# Altium PCB NRF24_PCB.PcbDoc
Units mm, origin at the board's own origin, x right, y up, seen from the top; angles counter-clockwise.
Board outline 30.29 x 14.5 mm, 2 copper layers (Top Layer, Bottom Layer); 2 components, 24 nets, 26 pads, 0 vias.
Unrouted connection lines stored in the file: 10.
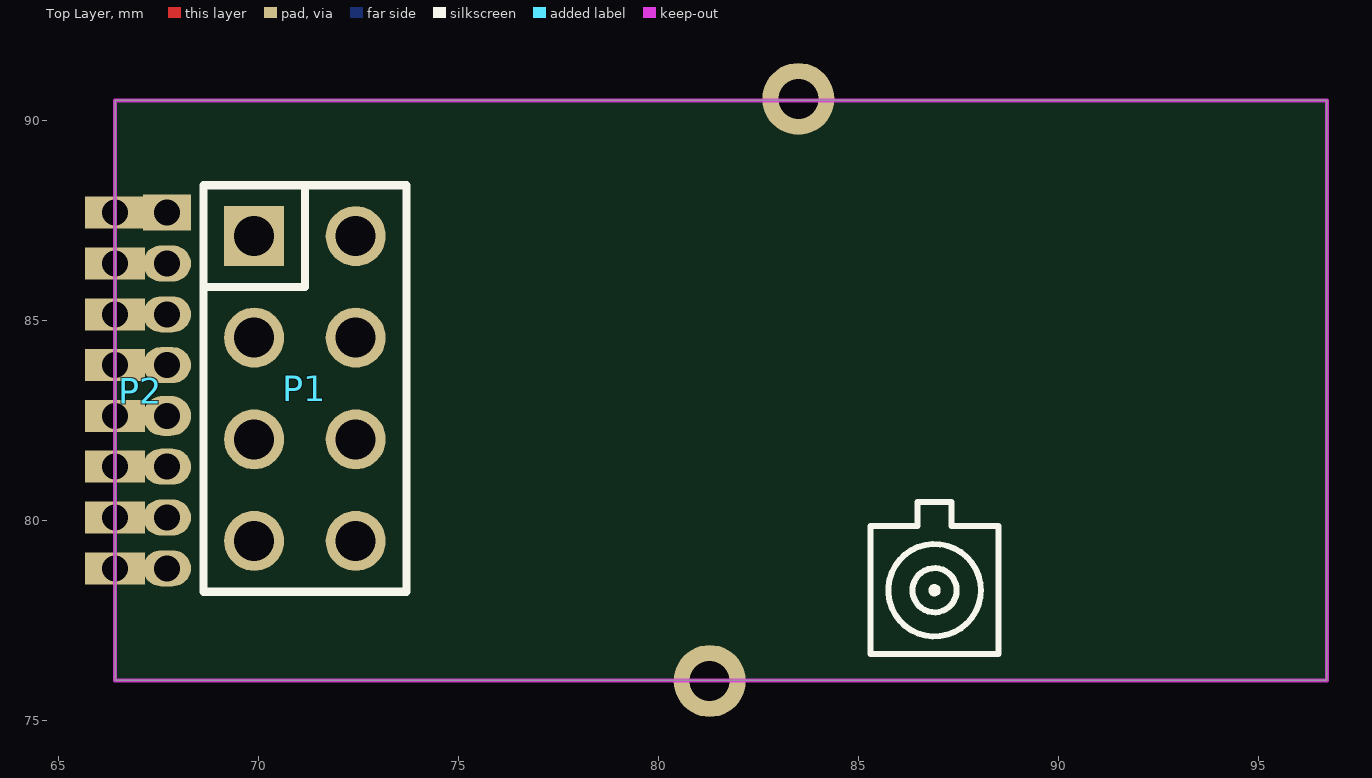
[diagram p0: Top Layer view]
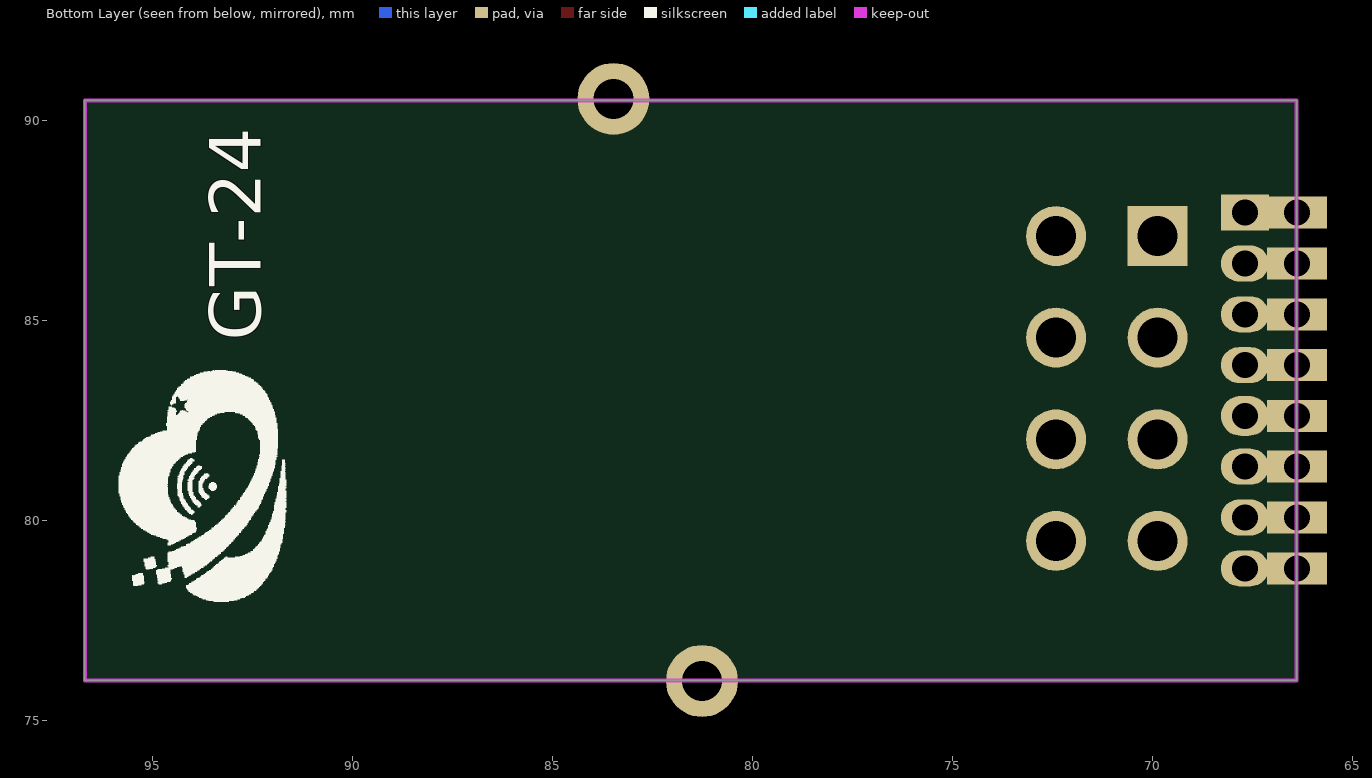
[diagram p1: Bottom Layer view, seen from below]

## Layer stack, top to bottom
Top Layer: signal copper 0.0356
Dielectric: dielectric 0.32, FR-4, Dk 4.8
Bottom Layer: signal copper 0.0356

## Board outline
66.406,90.503 96.697,90.503 96.697,76.003 66.406,76.003

## Design rules (kind name [scope] priority, off if disabled: settings)
Clearance [All] p1: gap=0.2
ComponentClearance [All] p1: gap=0 collisioncheckmode=3 verticalgap=0.254 showdistances=FALSE
HoleToHoleClearance [All] p1: gap=0 allowstackedmicrovias=TRUE
PolygonConnect [All] p1: connectstyle=Relief reliefconductorwidth=0.254 reliefentries=4 polygonreliefangle="90 Angle" airgapwidth=0.254
RoutingVias [All] p1: holewidth=0.711 width=1.27 viastyle="Through Hole" minholewidth=0.1 minwidth=0.1 maxholewidth=0.711 maxwidth=1.27
SilkToSilkClearance [All] p1: silktosilkclearance=0
SilkToSolderMaskClearance [IsPad] p1: minsilkscreentomaskgap=0 clearancetoexposedcopper=TRUE
SolderMaskExpansion [All] p1: expansion=0.102
Width [All] p1: maxlimit=1 minlimit=0.1 preferedwidth=0.3
24 further rules are at their usual default settings.

## Components (designator, comment, footprint, x,y, rotation, side; value= is the part's Value field where it differs from the comment)
P1 "Header 8" 2*4PIN 71.15,83.3 r0 top
P2 "Header 8" 8_MIN_PIN 67.05,83.25 r0 top

## Footprints (in the part's own frame and the unit in brackets; to place one, negate y for a bottom-side part, rotate by r counter-clockwise, add the part's x,y. Pads: shape width x height; smd on the part's side, far side on the other; paste and mask are expansions set on the pad)
2*4PIN [mm]
  rect 1.5x1.5 hole 1: 1(-1.27,3.81)
  round 1.5 hole 1: 2(1.27,3.81) 3(-1.27,1.27) 4(1.27,1.27) 5(-1.27,-1.27) 6(1.27,-1.27) 7(-1.27,-3.81) 8(1.27,-3.81)
  silkscreen extent -2.54,-5.08 2.54,5.08
8_MIN_PIN [mm]
  rect 1.5x0.8 hole 0.65: 1(-0.65,4.445) 2(-0.65,3.175) 3(-0.65,1.905) 4(-0.65,0.635) 5(-0.65,-0.635) 6(-0.65,-1.905) 7(-0.65,-3.175) 8(-0.65,-4.445)
  rect 1.2x0.9 hole 0.65: 1(0.65,4.445)
  oval 1.2x0.9 hole 0.65: 2(0.65,3.175) 3(0.65,1.905) 4(0.65,0.635) 6(0.65,-1.905) 7(0.65,-3.175) 8(0.65,-4.445)
  oval 1.2x1 hole 0.65: 5(0.65,-0.635)

## Part data
P1 P2: "Header, 8-Pin"

## Free pads (board coordinates)
  round 1.8 hole 1: 2(81.27,75.987) 2(83.484,90.539)

## Nets (pads, with @x,y where several pads share a name; then routed paths per layer and width w, separated by ;. In a path a pad name is that pad's centre, name@x,y a point inside that pad or via, vN(x,y) a via of type N, cw(c..) or ccw(c..) an arc to the next point about the centre after c; other vN are vias at no path point)
CE: P1.3 P2.2
CSN: P1.4 P2.3
GND: P1.1 P2.8 pad.2
IRQ: P1.8 P2.7
MISO: P1.7 P2.6
MOSI: P1.6 P2.5
NetC3_1: 
NetC4_2: 
NetC5_2: 
NetC6_2: 
NetC8_1: 
NetC8_2: 
NetC9_2: 
NetC10_2: 
NetC11_2: 
NetC14_1: 
NetC15_2: 
NetL1_1: 
NetL1_2: 
NetR1_1: 
NetR3_2: 
NetR4_2: 
SCK: P1.5 P2.4
VCC: P1.2 P2.1

## Keep-outs
Keep-Out Layer:
  the board outline again, w0.1

## Silkscreen, mask and mechanical layers (free items; w line width, h text height)
Top Overlay:
  circle w0.15: c86.891,78.257 r1.157
  circle w0.15: c86.891,78.257 r0.552
  circle w0.15: c86.891,78.257 r0.079
  lines w0.15: 85.291,76.657 88.491,76.657 88.491,78.257 88.491,79.857 87.316,79.857 87.316,80.457 86.466,80.457 86.466,79.857 85.291,79.857 85.291,76.657
Bottom Overlay:
  drawing of 659 lines, arcs and shapes, not listed
  text "GT-24" at 91.879,84.496 h2.2 r270